# EAGLE board Aegaeon REV B 20130130 PROTO (EAGLE 6.1)
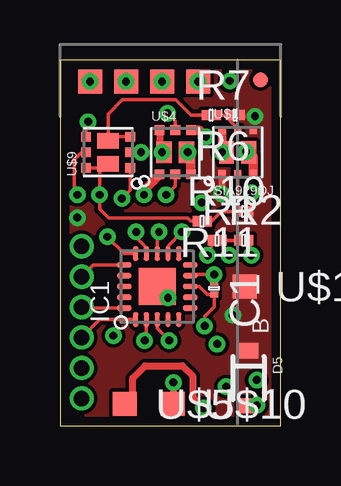
[diagram p0: board, top side]
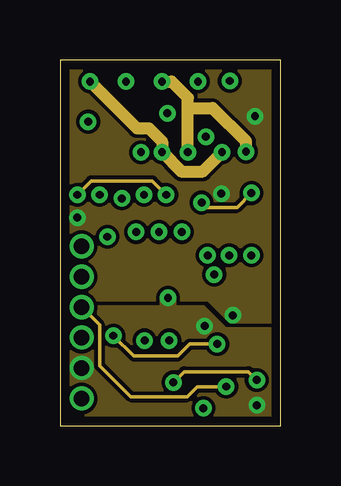
[diagram p1: board, inner layer Route8]
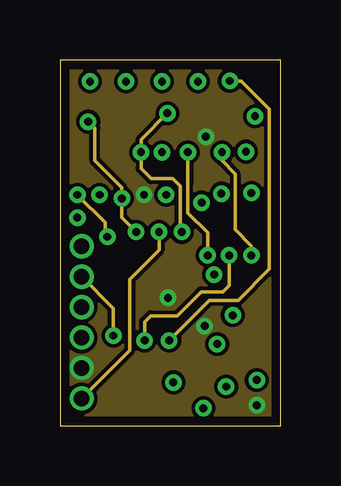
[diagram p2: board, inner layer Route9]
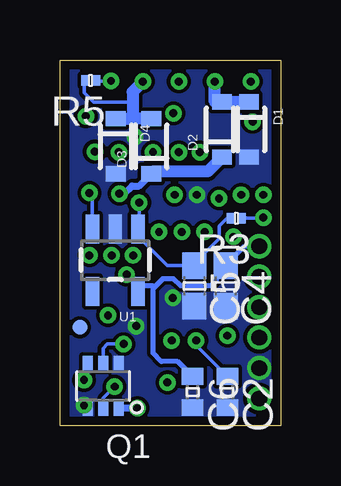
[diagram p3: board, bottom side, seen from below]

Size 9.2 x 15.25 mm. Coordinates in mm from the lower left corner, seen from the top.
Outline: 0,0 9.2,0 9.2,15.25 0,15.25 0,0
Copper layers (1*8+9*16): Top 0.0356mm / dielectric 1.5011mm / Route8 0.0356mm / dielectric 0.1499mm / Route9 0.0356mm / dielectric 0.2007mm / Bottom 0.0356mm
Design rules: minimum track width 6mil, minimum drill 13mil, track to track 6mil, track to pad 6mil, pad to pad 6mil, via to via 6mil, smd to smd 0mil, copper to edge 15mil, drill to drill 6mil, minimum pad ring 7mil, minimum via ring 7mil, stop-mask expansion 4mil, vias tented up to drill 0mil, thermal gap 10mil

## Footprints (pad centres in the part's own frame; a part is rotated, then mirrored left to right if it is on the bottom)
C0201 = smd 0.25 x 0.35: 1 -0.25,0; 2 0.25,0
C0402 = smd 0.7 x 0.9: 1 -0.65,0; 2 0.65,0
CPOL0603 = smd 1.1 x 1: 1 -0.85,0; 2 0.85,0
C0603 = smd 1.1 x 1: 1 -0.85,0; 2 0.85,0
SOD-323 = smd 0.63 x 0.83: 1 -1.15,0; 2 1.15,0
LED_SOLDER_PAD = smd 1 x 1: P$1 0,0
VQFN-20 = smd 0.6 x 0.22: P$1 -1.375,0.9; P$2 -1.375,0.45; P$3 -1.375,0; P$4 -1.375,-0.45; P$5 -1.375,-0.9; P$11 1.375,-0.9; P$12 1.375,-0.45; P$13 1.375,0; P$14 1.375,0.45; P$15 1.375,0.9 | smd 0.22 x 0.6: P$6 -0.9,-1.375; P$7 -0.45,-1.375; P$8 0,-1.375; P$9 0.45,-1.375; P$10 0.9,-1.375; P$16 0.9,1.375; P$17 0.45,1.375; P$18 0,1.375; P$19 -0.45,1.375; P$20 -0.9,1.375 | smd 1.55 x 1.55: P$21 0,0
MICRO-FIDUCIAL = smd 0.635 x 0.635: 1 0,0
SOT363 = smd 0.42 x 0.6: P$1 -0.65,0.95; P$2 0,0.95; P$3 0.65,0.95; P$4 0.65,-0.95; P$5 0,-0.95; P$6 -0.65,-0.95
R0201 = smd 0.28 x 0.43: 1 -0.255,0; 2 0.255,0
SOT23-5 = smd 0.55 x 1.2: 1 -0.95,-1.3; 2 0,-1.3; 3 0.95,-1.3; 4 0.95,1.3; 5 -0.95,1.3
SC70-6L = smd 0.3 x 0.325: D1 -0.65,0.912; D2 0.65,-0.912; G1 0,-0.912; G2 0,0.912; S1 -0.65,-0.912; S2 0.65,0.912 | smd 0.613 x 0.95: D1$2 -0.467,0; D2$2 0.467,0
UDFN6 = smd 0.4 x 0.4: D1 -0.65,0.925; D2 0.65,-0.925; G1 0,-0.925; G2 0,0.925; S1 -0.65,-0.925; S2 0.65,0.925 | smd 0.65 x 0.9: D1$1 -0.475,0; D2$2 0.475,0
POGO_PAD = smd 0.75 x 0.75: P$1 0,0

## Placement (x,y rotation side)
C1  .1uF  [C0201]  6.42,5.72 270 top
C2  .1uF  [C0402]  2.23,1.4 270 bottom
C4  47uF  [CPOL0603]  2.3,5.83 270 bottom
C5  4.7uF  [C0603]  3.6,5.83 270 bottom
C6  .1uF  [C0402]  3.68,1.4 270 bottom
D1  PMEG3015EJ,115  [SOD-323]  1.32,12.35 270 bottom
D2  PMEG3015EJ,115  [SOD-323]  2.45,12.35 90 bottom
D3  PMEG3015EJ,115  [SOD-323]  5.4,11.65 90 bottom
D4  PMEG3015EJ,115  [SOD-323]  6.88,11.65 270 bottom
D5  MM3Z27VT1G  [SOD-323]  7.85,1.98 270 top
DCC_L  PAD1MM  [LED_SOLDER_PAD]  2.75,14.35 0 top
DCC_R  PAD1MM  [LED_SOLDER_PAD]  5.75,14.35 0 top
IC1  ATTINY84A-MMH  [VQFN-20]  4.05,5.8 90 top
JP2  FIDUCIALUFIDUCIAL  [MICRO-FIDUCIAL]  8.35,14.43 0 top
JP4  FIDUCIALUFIDUCIAL  [MICRO-FIDUCIAL]  8.38,4.1 0 bottom
Q1  DMN65D8LDW  [SOT363]  7.4,1.65 180 bottom
R1  10K  [R0201]  6.55,7.72 0 top
R2  10K  [R0201]  7.65,7.72 0 top
R3  470  [R0201]  1.85,8.65 180 bottom
R5  3.3K  [R0201]  7.92,14.4 180 bottom
R6  10K  [R0201]  7.3,12.95 180 top
R7  470  [R0201]  6.3,12.95 0 top
R10  470  [R0201]  5.92,8.53 0 top
R11  10K  [R0201]  7.65,8.93 180 top
U1  V_REG_LDOSMD  [SOT23-5]  6.9,6.9 180 bottom
U$1  SIA929DJ  [SC70-6L]  7.4,11.4 0 top
U$2  PAD1MM  [LED_SOLDER_PAD]  4.25,14.35 0 top
U$3  PAD1MM  [LED_SOLDER_PAD]  1.25,14.35 0 top
U$4  SSM6N55NU  [UDFN6]  4.8,11.4 0 top
U$5  PAD1MM  [LED_SOLDER_PAD]  2.7,0.9 0 top
U$9  SSM6N55NU  [UDFN6]  2,11.4 90 top
U$10  PAD1MM  [LED_SOLDER_PAD]  4.7,0.9 0 top
U$11  PAD1MM  [LED_SOLDER_PAD]  7.7,5.8 0 top
U$14  PAD.75MM  [POGO_PAD]  0.9,3.67 0 top
U$15  PAD.75MM  [POGO_PAD]  0.9,4.94 0 top
U$16  PAD.75MM  [POGO_PAD]  0.9,6.21 0 top
U$17  PAD.75MM  [POGO_PAD]  0.9,1.13 0 top
U$18  PAD.75MM  [POGO_PAD]  0.9,2.4 0 top
U$19  PAD.75MM  [POGO_PAD]  0.9,7.48 0 top

## Library data of the parts
C1 C2 C4-C6 R1-R3 R5-R7 R10 R11 = rcl
D1-D4 DCC_L DCC_R IC1 Q1 U$1-U$5 U$9-U$11 U$14-U$19 = Railstars
D5 = SparkFun-DiscreteSemi
JP2 JP4 = SparkFun-Aesthetics
U1 = SparkFun-PowerIC

## Nets
5V: C1.1 C4.1 C6.1 IC1.P$9 U1.5 U$19.P$1
!RESET: IC1.P$13 U$17.P$1
BEMF: C2.1 IC1.P$2 R1.2 R2.1
DCC_L: D1.1 D2.2 DCC_L.P$1
DCC_L_LL: IC1.P$3 R5.1
DCC_R: D3.2 D4.1 DCC_R.P$1 R5.2
F0F: Q1.P$4 U$10.P$1
F0R: Q1.P$1 U$5.P$1
FORWARD: IC1.P$15 U$4.G1 U$9.G2
GND: C1.2 C2.2 C4.2 C5.2 C6.2 D1.2 D4.2 D5.2 IC1.P$8 IC1.P$21 Q1.P$3 Q1.P$6 U1.2 U$4.S1 U$4.S2 U$18.P$1
MISO: IC1.P$20 Q1.P$2 U$15.P$1
MOSI: IC1.P$16 Q1.P$5 U$16.P$1
MOTOR_L: R2.2 U$1.D1 U$1.D1$2 U$3.P$1 U$4.D1 U$4.D1$1
MOTOR_R: R1.1 U$1.D2 U$1.D2$2 U$2.P$1 U$4.D2 U$4.D2$2
N$1: R6.2 R7.2 U$1.G2
N$2: C5.1 R3.2 U1.1 U1.3
N$4: R10.2 R11.2 U$1.G1
N$10: R10.1 U$9.D1 U$9.D1$1
N$11: R7.1 U$9.D2 U$9.D2$2
PWM: IC1.P$14 U$9.S1 U$9.S2
REVERSE: IC1.P$12 U$4.G2 U$9.G1
SCK: IC1.P$1 U$14.P$1
VDCC: D2.1 D3.1 D5.1 R3.1 R6.1 R11.1 U$1.S1 U$1.S2 U$11.P$1

## Tracks (layer width: path | path; a pad name or v marks a point on that pad's centre or on a via)
5V  (via drill 0.33, 0.65)
  Top 0.152: C1.1 v6.42,6.3 5.48,6.3 IC1.P$9
  Bottom 0.2: U$19.P$1 1.49,7.48 C4.1 2.7,6.28 2.7,6.05 2.93,5.83 4.17,5.83 4.48,6.12 4.92,6.12 5.33,5.72 | C6.1 4.3,2.67 4.98,2.67 5.33,3.02 5.33,5.72 | 5.33,5.72 5.33,5.83 5.73,5.83 U1.5 5.95,5.83 v6.42,6.3
  other vias: 0.9,7.48
!RESET  (via drill 0.33, 0.65)
  Top 0.152: IC1.P$13 4.05,8 v4.12,8.07
  Route9 0.152: U$17.P$1 2.9,3.13 2.9,6.1 4.12,7.33 v4.12,8.07
  other vias: 0.9,1.13
BEMF  (via drill 0.33)
  Top 0.152: R2.1 R1.2 6.81,7.34 v7.05,7.1 | IC1.P$2 3.6,3.62 v3.53,3.55
  Route9 0.152: v3.53,3.55 3.53,4.33 3.78,4.58 4.88,4.58 5.88,5.58 6.78,5.58 7.05,5.85 v7.05,7.1
  Bottom 0.152: C2.1 3.53,3.35 v3.53,3.55
DCC_L  (via drill 0.33)
  Bottom 0.5: D1.1 D2.2 2.75,13.5 DCC_L.P$1
  other vias: 2.75,14.35
DCC_L_LL  (via drill 0.33)
  Top 0.152: IC1.P$3 4.05,4.05 v4.55,3.55
  Route9 0.152: v4.55,3.55 6.23,5.22 7.42,5.22 8.72,6.53 8.72,13.2 7.55,14.38 v7.08,14.38
  Bottom 0.152: v7.08,14.38 7.55,14.38 7.65,14.38 R5.1
DCC_R  (via drill 0.33)
  Bottom 0.152: R5.2 8.18,13.88 7.98,13.68 7.8,13.5 6.17,13.5
  Bottom 0.5: D3.2 6.17,12.8 | D4.1 6.17,12.8 | DCC_R.P$1 6.17,13.93 6.17,13.5 6.17,12.8
  other vias: 5.75,14.35
F0F  (via drill 0.33)
  Top 0.3: v4.73,1.8 4.73,0.93 U$10.P$1
  Route8 0.152: v4.73,1.8 5.17,2.25 7.85,2.25 v8.2,1.9
  Bottom 0.152: Q1.P$4 8.05,2.05 v8.2,1.9
F0R  (via drill 0.33)
  Top 0.3: U$5.P$1 3.03,1.23 3.03,1.98 3.55,2.5 5.1,2.5 5.53,2.08 5.53,1.18 v5.98,0.72
  Bottom 0.3: v5.98,0.72 6.73,0.72 Q1.P$1
FORWARD  (via drill 0.33)
  Top 0.152: U$9.G2 0.9,11.4 0.6,11.1 0.6,9.75 v0.72,9.62 | IC1.P$15 2.68,7.17 v1.97,7.88 | U$4.G1 4.8,10 v4.42,9.62
  Route8 0.152: v4.42,9.62 3.85,10.2 1.47,10.2 1.3,10.2 v0.72,9.62
  Route9 0.152: v1.97,7.88 1.87,7.97 1.87,8.47 v0.72,9.62
GND  (via drill 0.33, 0.65)
  Top 0.152: IC1.P$8 5.8,5.8 6.12,5.47 C1.2 6.42,4.95 6.3,4.83 6.03,4.55 v6.03,4.15 | v8.2,0.85 7.88,0.85 D5.2
  Top 0.2: v4.5,5.33 4.5,5.35 IC1.P$21
  Top 0.4: U$4.S2 5.8,12.32 v6.08,12.05 | U$4.S1 3.9,10.22 3.5,9.82 v3.5,9.62
  other vias: 0.9,2.4
  pour Bottom (no thermals): -0.3,0 -0.3,15.25 9.2,15.25 9.2,0
  pour Route9: 9.2,15.25 -0.3,15.25 -0.3,0 9.2,0
  pour Route8 (rank 2): -0.3,0 9.2,0 9.2,5.28 -0.3,5.28
MISO  (via drill 0.33, 0.65)
  Top 0.152: IC1.P$20 0.94,4.9 U$15.P$1
  Route8 0.152: U$15.P$1 1.65,4.19 1.65,2.5 2.95,1.2 5.3,1.2 5.73,1.62 v6.92,1.62
  Bottom 0.152: Q1.P$2 7.4,1.15 v6.92,1.62
  other vias: 0.9,4.94
MOSI  (via drill 0.33, 0.65)
  Top 0.152: IC1.P$16 1.39,6.7 U$16.P$1
  Route8 0.152: v2.23,3.75 3.08,2.9 4.9,2.9 5.4,3.4 v6.55,3.4
  Route9 0.152: v2.23,3.75 2.23,4.88 U$16.P$1
  Bottom 0.152: Q1.P$5 7.4,3.23 7.23,3.4 v6.55,3.4
  other vias: 0.9,6.21
MOTOR_L  (via drill 0.33)
  Top 0.152: R2.2 7.91,7.17 v7.98,7.1
  Top 0.3: U$4.D1 4.15,11.4 v4.25,11.4 U$4.D1$1
  Top 0.35: U$1.D1 v6.75,11.4
  Top 0.4: v6.75,11.4 U$1.D1$2
  Route8 0.5: U$3.P$1 3.2,12.4 3.7,12.4 4.25,11.85 v4.25,11.4 5.05,10.6 5.95,10.6 v6.75,11.4
  Route9 0.152: v6.75,11.4 6.75,11.05 7.3,10.5 7.3,8.18 7.98,7.5 v7.98,7.1
  other vias: 1.25,14.35
MOTOR_R  (via drill 0.33)
  Top 0.152: R1.1 6.29,7.25 v6.15,7.1
  Top 0.3: v5.33,11.4 U$4.D2$2
  Top 0.4: U$1.D2 8.05,11.22 U$1.D2$2 7.84,11.43 v7.75,11.43 | U$4.D2 5.45,11.28 v5.33,11.4
  Route8 0.5: 5.33,13.25 6.35,13.25 7.75,11.85 v7.75,11.43 | v5.33,11.4 5.33,13.25 | 5.33,13.25 5.33,13.68 4.65,14.35 U$2.P$1
  Route9 0.152: v6.15,7.1 6.15,8.05 5.33,8.88 5.33,10.1 5.33,10.12 v5.33,11.4
  other vias: 4.25,14.35
N$1
  Top 0.152: U$1.G2 7.4,12.4 7.1,12.7 7.1,12.89 R6.2 R7.2
N$2  (via drill 0.33)
  Route8 0.152: v5.9,9.3 6.1,9.1 7.38,9.1 v7.98,9.7
  Bottom 0.152: v7.98,9.7 7.85,9.57 U1.3 | R3.2 2.13,8.62 2.28,8.62 2.58,8.32 2.58,7.8 3.18,7.2 3.18,7.12 3.6,6.7 C5.1 4.42,6.67 4.73,6.67 5.65,7.6 5.95,7.9 U1.1 5.9,8.2 v5.9,9.3
  Bottom 0.2: 7.9,8.25 U1.3
N$4
  Top 0.152: U$1.G1 R11.2 6.73,8.93 6.33,8.53 R10.2
N$10  (via drill 0.33)
  Top 0.152: U$9.D1 1.82,10.75 U$9.D1$1 1.65,10.57 v1.65,9.62 1.65,9.03 2.03,8.65 5.32,8.65 5.45,8.53 R10.1
N$11
  Top 0.152: R7.1 5.48,12.95 4.83,13.6 2.6,13.6 2,13 U$9.D2$2 2.18,12.05 U$9.D2
PWM  (via drill 0.33)
  Top 0.152: U$9.S2 1.07,12.57 v1.18,12.68 | U$9.S1 2.93,9.82 v2.58,9.47 | IC1.P$14 3.6,7.42 3.18,7.85 3.18,7.95 v3.18,8.07
  Route9 0.152: v3.18,8.07 2.58,8.68 v2.58,9.47 2.58,9.93 1.45,11.05 1.45,12.4 v1.18,12.68
REVERSE  (via drill 0.33)
  Top 0.152: U$9.G1 3.2,11.4 3.45,11.65 3.45,11.32 v3.38,11.4 | U$4.G2 4.8,12.7 v4.48,13.03 | IC1.P$12 4.5,7.5 v5.08,8.07
  Route9 0.152: v4.48,13.03 3.38,11.93 v3.38,11.4 3.38,10.72 3.8,10.3 4.7,10.3 5,10 5,8.93 5,8.15 v5.08,8.07
SCK  (via drill 0.65)
  Top 0.152: IC1.P$1 1.66,4.42 U$14.P$1
  other vias: 0.9,3.67
VDCC  (via drill 0.33)
  Top 0.3: R6.1 7.61,12.9 | 6.75,10.05 U$1.S1
  Bottom 0.152: v0.72,8.68 0.75,8.65 R3.1
  Bottom 0.3: v6.73,9.68 6.53,9.68 6.2,10 5.9,10 D3.1
  Bottom 0.5: D2.1 3.05,10.6 5.3,10.6 D3.1
  other vias: 8.12,12.9 7.2,4.6
  pour Top (no thermals): -0.3,15.25 9.2,15.25 9.2,0 -0.3,0
  pour Route8 (no thermals): -0.3,15.25 9.2,15.25 9.2,4.33 7.1,4.33 6.17,5.25 -0.3,5.25

## Text on the board
tPlace: B
tDocu: Aegaeon:L2 DCC Decoder | Copyright (C) 2012, Railstars Limited | All Rights Reserved